# EAGLE board GucciMain (EAGLE 9.1.0)
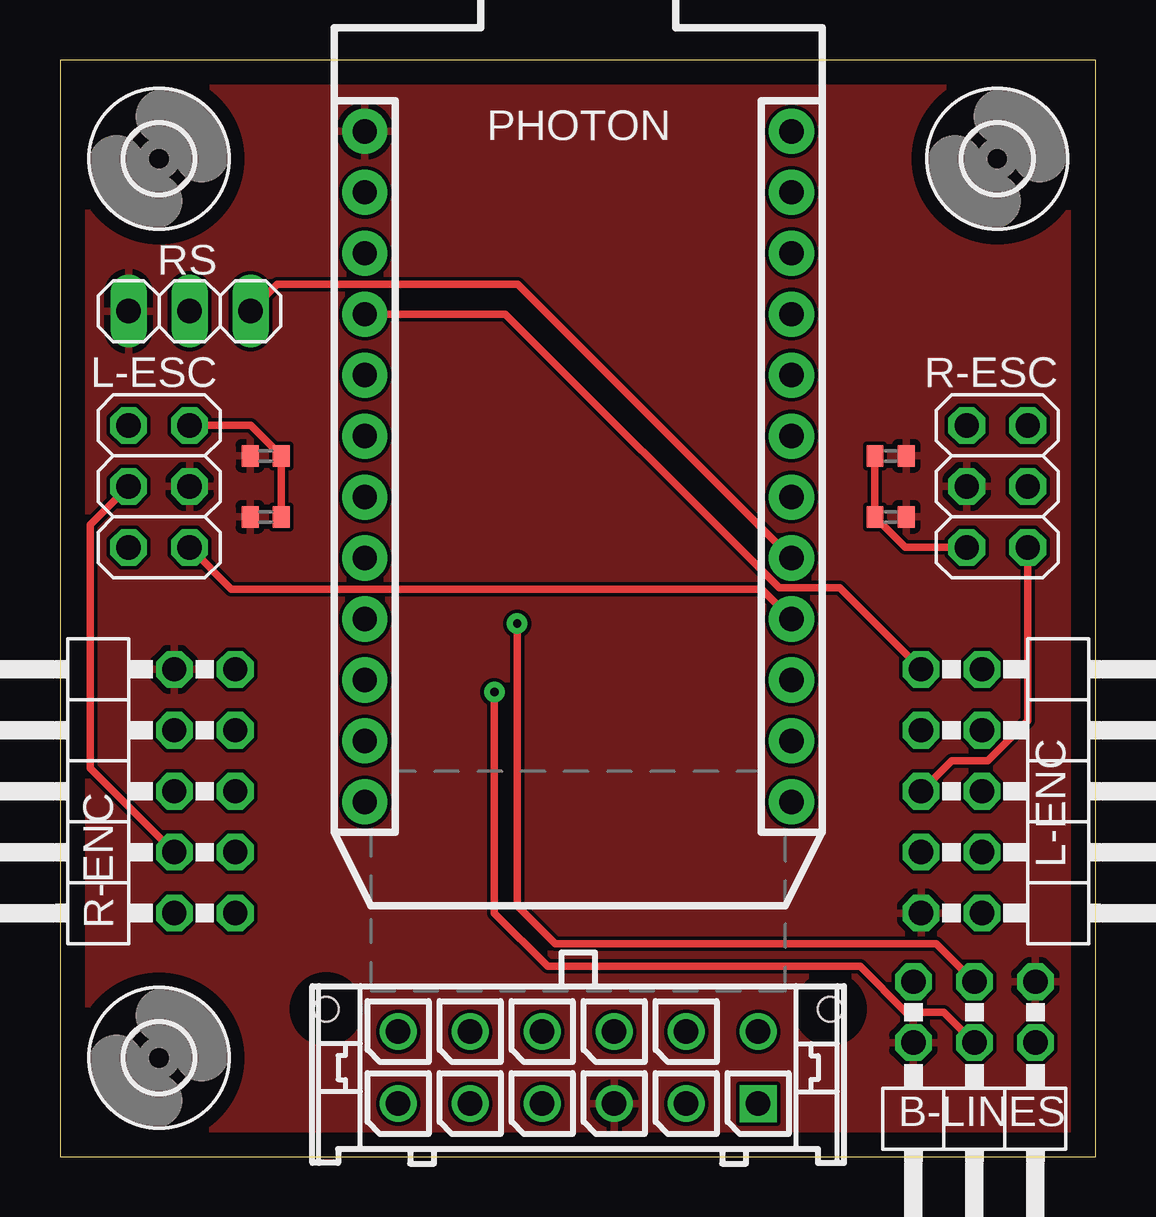
[diagram p0: board, top side]
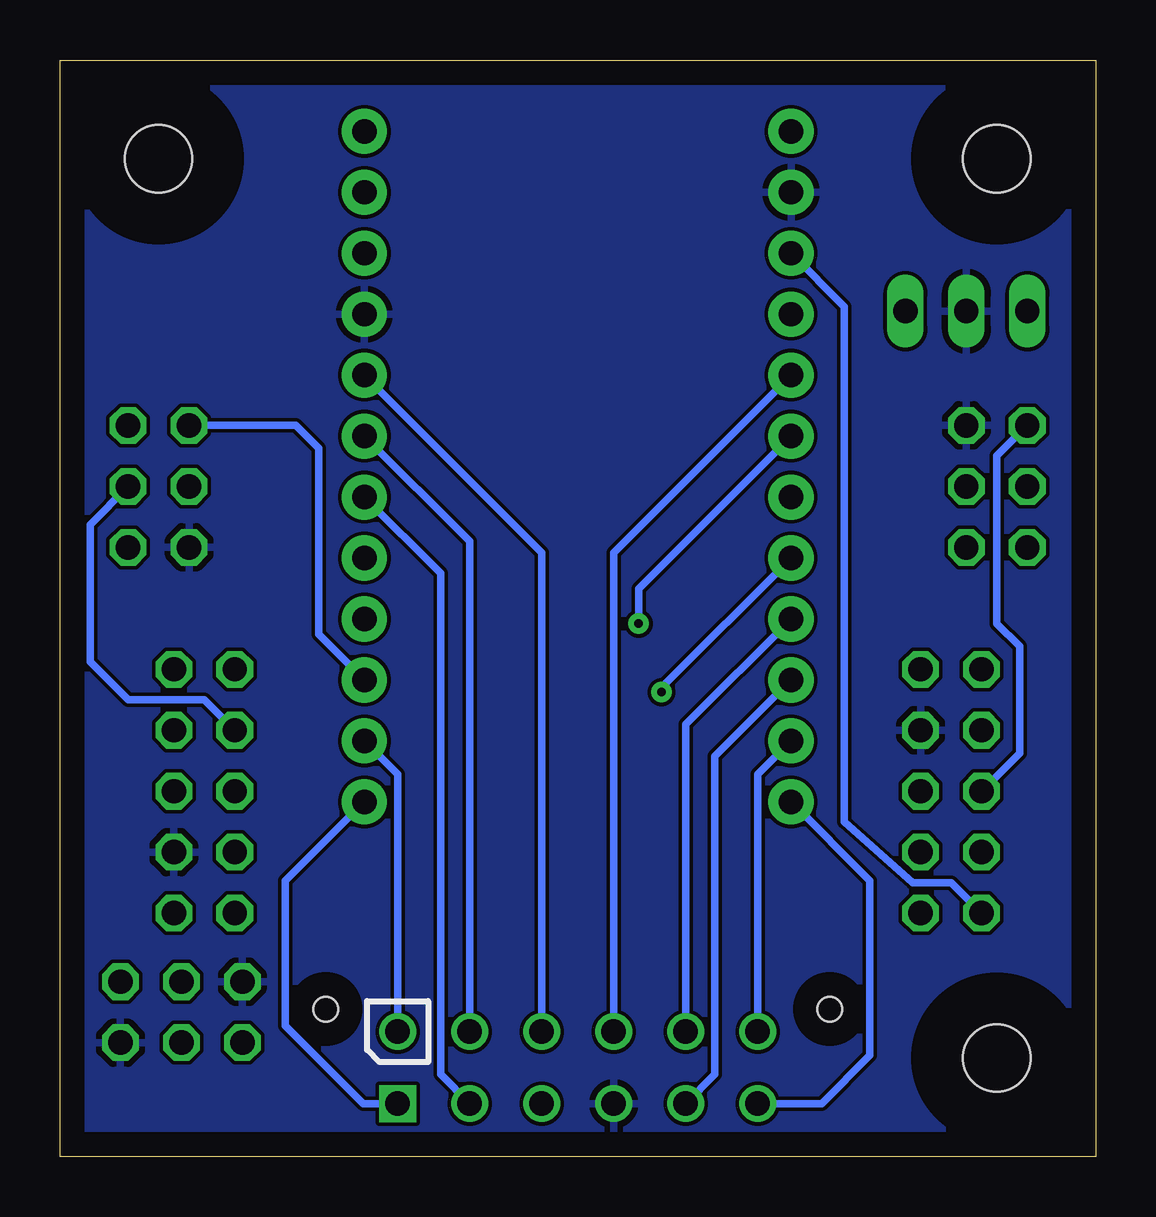
[diagram p1: board, bottom side, seen from below]

Size 43.16 x 45.71 mm. Coordinates in mm from the lower left corner, seen from the top.
Outline: 0,0 43.16,0 43.16,45.71 0,45.71 0,0
Copper layers (1*16): Top 0.035mm / dielectric 1.5mm / Bottom 0.035mm
Design rules "Gucci_DRC": minimum track width 6mil, minimum drill 0.35mm, track to track 6mil, track to pad 6mil, pad to pad 6mil, via to via 6mil, smd to smd 6mil, copper to edge 40mil, drill to drill 6mil, minimum pad ring 10mil, minimum via ring 10mil, stop-mask expansion 4mil, vias tented up to drill 15mil, thermal gap 10mil

## Footprints (pad centres in the part's own frame; a part is rotated, then mirrored left to right if it is on the bottom)
2X03/90 = drill 1.016 octagon: 1 -2.54,-6.35; 2 -2.54,-3.81; 3 0,-6.35; 4 0,-3.81; 5 2.54,-6.35; 6 2.54,-3.81
C0402 = smd 0.7 x 0.9: 1 -0.65,0; 2 0.65,0
2X05/90 = drill 1.016 octagon: 1 -5.08,-6.35; 2 -5.08,-3.81; 3 -2.54,-6.35; 4 -2.54,-3.81; 5 0,-6.35; 6 0,-3.81; 7 2.54,-6.35; 8 2.54,-3.81; 9 5.08,-6.35; 10 5.08,-3.81
2X03 = drill 1.016 octagon: 1 -2.54,-1.27; 2 -2.54,1.27; 3 0,-1.27; 4 0,1.27; 5 2.54,-1.27; 6 2.54,1.27
PHOTON = drill 1.016 pad 1.88: 1 1.27,32.258; 2 1.27,29.718; 3 1.27,27.178; 4 1.27,24.638; 5 1.27,22.098; 6 1.27,19.558; 7 1.27,17.018; 8 1.27,14.478; 9 1.27,11.938; 10 1.27,9.398; 11 1.27,6.858; 12 1.27,4.318; 13 19.05,4.318; 14 19.05,6.858; 15 19.05,9.398; 16 19.05,11.938; 17 19.05,14.478; 18 19.05,17.018; 19 19.05,19.558; 20 19.05,22.098; 21 19.05,24.638; 22 19.05,27.178; 23 19.05,29.718; 24 19.05,32.258
1X03 = drill 1.016 long: 1 -2.54,0; 2 0,0; 3 2.54,0
2,8 = hole 2.8: 0,0
43045-1212 = drill 1.02 square: P$1 7.5,0 | drill 1.02: P$2 4.5,0; P$3 1.5,0; P$4 -1.5,0; P$5 -4.5,0; P$6 -7.5,0; P$7 7.5,3; P$8 4.5,3; P$9 1.5,3; P$10 -1.5,3; P$11 -4.5,3; P$12 -7.5,3 | hole 1.02: 10.5,3.94; -10.5,3.94

## Placement (x,y rotation side)
B-LINES  [2X03/90]  38.1,0.95 180 top
C1  1uF  [C0402]  8.57,29.21 0 top
C2  1uF  [C0402]  34.61,26.67 180 top
C3  .1uF  [C0402]  8.57,26.67 0 top
C4  .1uF  [C0402]  34.61,29.21 180 top
L-ENC  [2X05/90]  42.23,15.24 270 top
L-ESC  [2X03]  4.13,27.94 270 top
PHOTON  PHOTON  [PHOTON]  11.43,10.48 0 top
R-ENC  [2X05/90]  0.95,15.24 90 top
R-ESC  [2X03]  39.05,27.94 270 top
RS  [1X03]  5.4,35.24 0 top
U$2  [2,8]  4.13,4.13 0 top
U$3  [2,8]  4.13,41.59 0 top
U$4  [2,8]  39.05,41.59 0 top
X1  [43045-1212]  21.59,2.22 0 top

## Library data of the parts
B-LINES L-ENC L-ESC R-ENC R-ESC RS = pinhead
C1-C4 = rcl; SPICEPREFIX: C
PHOTON = Particle
U$2-U$4 = holes
X1 = con-molex-micro-fit-3_0

## Nets
3V3: PHOTON.24
A1: L-ENC.5 R-ESC.6
A2: L-ESC.1 R-ENC.6
B1: L-ENC.3 R-ESC.4
B2: L-ESC.3 R-ENC.4
BL: B-LINES.4 PHOTON.8
BR: B-LINES.3 PHOTON.6
FL: PHOTON.10 X1.P$5
FR: PHOTON.9 X1.P$11
GND: B-LINES.2 B-LINES.5 C1.2 C2.2 C3.2 C4.2 L-ENC.8 L-ESC.2 PHOTON.2 PHOTON.21 R-ENC.7 R-ESC.5 RS.2 X1.P$4
I1: L-ENC.1 PHOTON.4
I2: PHOTON.3 R-ENC.2
L-CONTROL: PHOTON.15 R-ESC.1
R-CONTROL: L-ESC.6 PHOTON.16
RS-OUT: PHOTON.17 RS.3
SCL: PHOTON.14 X1.P$7
SDA: PHOTON.13 X1.P$1
SHDN1: PHOTON.12 X1.P$6
SHDN2: PHOTON.11 X1.P$12
SHDN3: PHOTON.5 X1.P$10
SHDN4: PHOTON.18 X1.P$2
SHDN5: PHOTON.19 X1.P$8
SHDN6: PHOTON.20 X1.P$9
VBAT: PHOTON.22
VCC: B-LINES.1 B-LINES.6 C1.1 C2.1 C3.1 C4.1 L-ENC.9 L-ESC.4 PHOTON.1 R-ENC.10 R-ESC.3 RS.1 X1.P$3

## Tracks (layer width: path | path; a pad name or v marks a point on that pad's centre or on a via)
A1
  Top 0.305: L-ENC.5 37.15,16.51 38.66,16.51 40.32,18.18 R-ESC.6
A2
  Bottom 0.305: L-ESC.1 4.13,29.21 4.13,22.23 3.17,21.27 3.17,16.83 R-ENC.6
B1
  Bottom 0.305: L-ENC.3 37.15,19.05 40.32,19.05 41.91,20.64 41.91,26.35 R-ESC.4
B2
  Top 0.305: R-ENC.4 1.27,16.19 1.27,26.35 L-ESC.3
BL  (via drill 0.35)
  Top 0.305: B-LINES.4 36.83,6.03 35.24,6.03 33.34,7.94 20.32,7.94 18.1,10.16 v18.1,19.37
  Bottom 0.305: PHOTON.8 18.1,19.56 v18.1,19.37
BR  (via drill 0.35)
  Top 0.305: B-LINES.3 36.51,8.89 20.64,8.89 19.05,10.48 v19.05,22.23
  Bottom 0.305: 19.05,22.1 v19.05,22.23 19.05,23.69 PHOTON.6
FL
  Bottom 0.305: X1.P$5 15.88,3.44 15.88,16.7 PHOTON.10
FR
  Bottom 0.305: X1.P$11 17.09,18.03 PHOTON.9
GND
  Top 0.305: C4.2 C2.2 35.23,25.4 R-ESC.5 | C3.2 C1.2 7.95,30.48 L-ESC.2
  pour Bottom: 0,45.72 0,0 43.18,0 43.18,45.72
I1
  Top 0.305: L-ENC.1 32.49,23.71 29.96,23.71 18.56,35.12 PHOTON.4
I2
  Bottom 0.305: R-ENC.2 6.03,11.43 7.62,11.43 10.48,13.97 10.48,35.43 PHOTON.3
L-CONTROL
  Bottom 0.305: PHOTON.15 32.38,21.78 32.38,29.53 33.34,30.48 R-ESC.1
R-CONTROL
  Top 0.305: PHOTON.16 29.23,23.66 7.14,23.66 L-ESC.6
RS-OUT
  Top 0.305: PHOTON.17 19.07,36.36 9.05,36.36 RS.3
SCL
  Bottom 0.305: X1.P$7 29.09,15.95 PHOTON.14
SDA
  Bottom 0.305: PHOTON.13 33.77,11.51 33.77,5.47 30.52,2.22 X1.P$1
SHDN1
  Bottom 0.305: X1.P$6 11.43,2.22 9.41,4.24 9.41,11.51 PHOTON.12
SHDN2
  Bottom 0.305: X1.P$12 14.09,15.95 PHOTON.11
SHDN3
  Bottom 0.305: PHOTON.5 20.09,25.19 X1.P$10
SHDN4
  Bottom 0.305: X1.P$2 27.3,3.44 27.3,24.32 PHOTON.18
SHDN5
  Bottom 0.305: X1.P$8 26.09,25.64 PHOTON.19
SHDN6
  Bottom 0.305: X1.P$9 23.09,25.19 PHOTON.20
VCC
  pour Top: 0,45.72 0,0 43.18,0 43.18,45.72